# EAGLE board QuadSerialHBridge-1.0-bad (EAGLE 6.4)
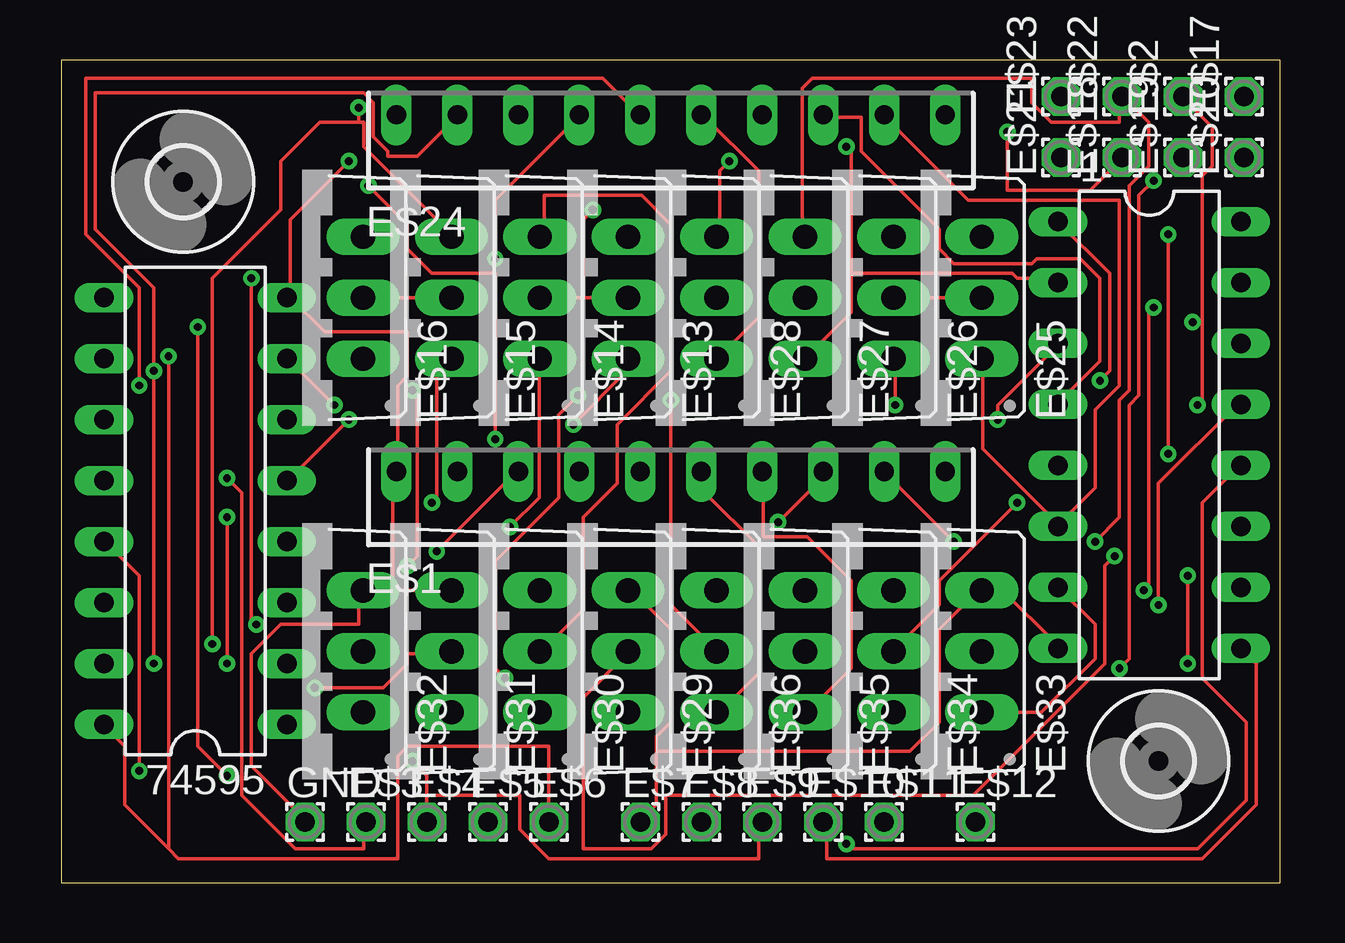
[diagram p0: board, top side]
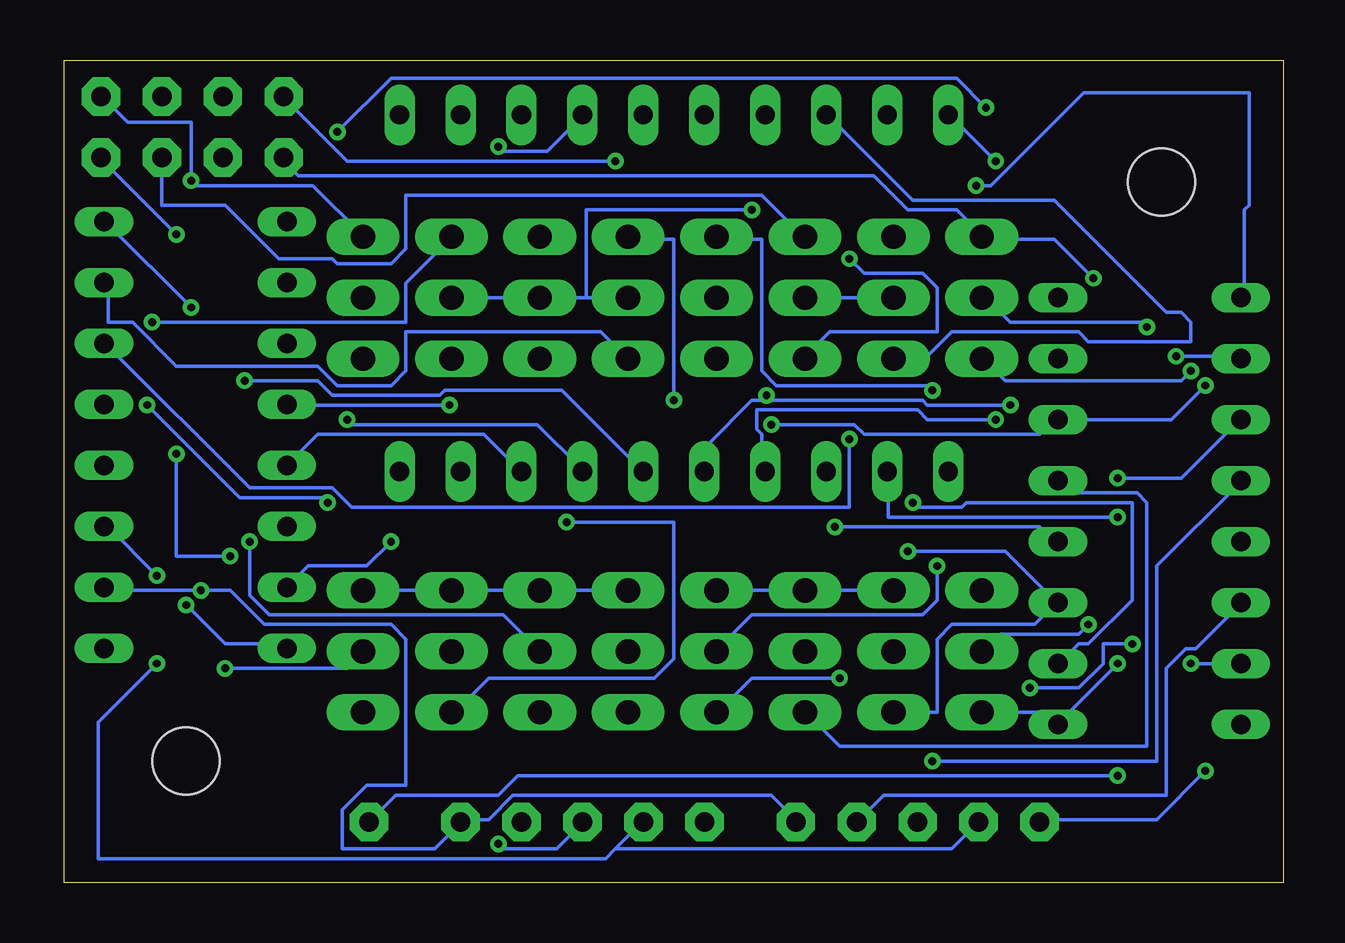
[diagram p1: board, bottom side, seen from below]

Size 50.8 x 34.29 mm. Coordinates in mm from the lower left corner, seen from the top.
Outline: 0,34.29 0,0 50.8,0 50.8,34.29 0,34.29
Copper layers (1*16): Top 0.0356mm / dielectric 1.5011mm / Bottom 0.0356mm
Design rules "LaenPCBOrder": minimum track width 6mil, minimum drill 13mil, track to track 6mil, track to pad 6mil, pad to pad 6mil, via to via 6mil, smd to smd 6mil, copper to edge 15mil, drill to drill 6mil, minimum pad ring 7mil, minimum via ring 7mil, stop-mask expansion 4mil, vias tented up to drill 0mil, thermal gap 10mil

## Footprints (pad centres in the part's own frame; a part is rotated, then mirrored left to right if it is on the bottom)
DIL16 = drill 0.813 long: 1 -8.89,-3.81; 2 -6.35,-3.81; 3 -3.81,-3.81; 4 -1.27,-3.81; 5 1.27,-3.81; 6 3.81,-3.81; 7 6.35,-3.81; 8 8.89,-3.81; 9 8.89,3.81; 10 6.35,3.81; 11 3.81,3.81; 12 1.27,3.81; 13 -1.27,3.81; 14 -3.81,3.81; 15 -6.35,3.81; 16 -8.89,3.81
SIP-10 = drill 0.8 pad 1.27 long: 1 -11.43,0; 2 -8.89,0; 3 -6.35,0; 4 -3.81,0; 5 -1.27,0; 6 1.27,0; 7 3.81,0; 8 6.35,0; 9 8.89,0; 10 11.43,0
1,6/0,8 = drill 0.813 pad 1.6 octagon: 1 0,0
TO220V = drill 1.016 long: 1 -2.54,-2.54; 2 0,-2.54; 3 2.54,-2.54
2,8 = hole 2.8: 0,0

## Placement (x,y rotation side)
1  74595  [DIL16]  45.34,18.67 270 top
74595  74595  [DIL16]  5.59,15.49 90 top
E$1  [SIP-10]  25.4,17.14 0 top
E$2  [1,6/0,8]  46.74,32.77 90 top
E$3  [1,6/0,8]  12.7,2.54 0 top
E$4  [1,6/0,8]  15.24,2.54 0 top
E$5  [1,6/0,8]  17.78,2.54 0 top
E$6  [1,6/0,8]  20.32,2.54 0 top
E$7  [1,6/0,8]  24.13,2.54 0 top
E$8  [1,6/0,8]  26.67,2.54 0 top
E$9  [1,6/0,8]  29.21,2.54 0 top
E$10  [1,6/0,8]  31.75,2.54 0 top
E$11  [1,6/0,8]  34.29,2.54 0 top
E$12  [1,6/0,8]  38.1,2.54 0 top
E$13  [TO220V]  21.08,24.38 90 top
E$14  [TO220V]  17.4,24.38 90 top
E$15  [TO220V]  13.72,24.38 90 top
E$16  [TO220V]  10.03,24.38 90 top
E$17  [1,6/0,8]  49.28,32.77 90 top
E$18  [1,6/0,8]  44.2,30.23 90 top
E$19  [1,6/0,8]  46.74,30.23 90 top
E$20  [1,6/0,8]  49.28,30.23 90 top
E$21  [1,6/0,8]  41.66,30.23 90 top
E$22  [1,6/0,8]  44.2,32.77 90 top
E$23  [1,6/0,8]  41.66,32.77 90 top
E$24  [SIP-10]  25.4,32 0 top
E$25  [TO220V]  35.81,24.38 90 top
E$26  [TO220V]  32.13,24.38 90 top
E$27  [TO220V]  28.45,24.38 90 top
E$28  [TO220V]  24.77,24.38 90 top
E$29  [TO220V]  21.08,9.65 90 top
E$30  [TO220V]  17.4,9.65 90 top
E$31  [TO220V]  13.72,9.65 90 top
E$32  [TO220V]  10.03,9.65 90 top
E$33  [TO220V]  35.81,9.65 90 top
E$34  [TO220V]  32.13,9.65 90 top
E$35  [TO220V]  28.45,9.65 90 top
E$36  [TO220V]  24.77,9.65 90 top
E$40  [2,8]  5.08,29.21 0 top
E$42  [2,8]  45.72,5.08 0 top
GND  [1,6/0,8]  10.16,2.54 0 top

## Library data of the parts
1 74595 = 74xx-us
E$1 E$24 = linear
E$2-E$12 E$17-E$23 GND = wirepad
E$13-E$16 E$25-E$36 = transistor-pnp
E$40 E$42 = holes

## Nets
S$1: 74595.1 E$1.2 E$32.1
S$2: 1.10 1.16 74595.10 74595.16 E$6.1 E$11.1
S$3: 1.11 74595.11 E$3.1 E$8.1
S$4: 1.12 74595.12 E$4.1 E$9.1
S$5: 74595.14 E$5.1
S$6: 1.14 74595.9
S$7: 1.15 E$24.6 E$28.1
S$8: 74595.2 E$15.1 E$24.3
S$9: E$12.1 E$13.2 E$14.2 E$15.2 E$16.2 E$25.2 E$26.2 E$27.2 E$28.2
S$10: 74595.15 E$16.1 E$24.2
S$11: 74595.4 E$14.1 E$24.4
S$12: 1.8 1.13 74595.8 74595.13 E$1.1 E$7.1 E$24.1 E$29.3 E$30.3 E$31.3 E$32.3 E$33.3 E$34.3 E$35.3 E$36.3 GND.1
S$13: 1.2 E$24.7 E$27.1
S$14: 1.4 E$24.8 E$26.1
S$15: 1.6 E$24.9 E$25.1
S$16: 1.1 E$1.6 E$36.1
S$17: 1.3 E$1.7 E$35.1
S$18: 1.5 E$1.8 E$34.1
S$19: 74595.3 E$1.3 E$31.1
S$20: 74595.5 E$1.4 E$30.1
S$21: 1.7 E$1.9 E$33.1
S$22: 1.9 E$10.1
S$23: 74595.6 E$13.1 E$24.5
S$24: 74595.7 E$1.5 E$29.1
S$25: E$23.1 E$28.3 E$36.2
S$26: E$22.1 E$27.3 E$35.2
S$27: E$2.1 E$26.3 E$34.2
S$28: E$16.3 E$21.1 E$32.2
S$29: E$15.3 E$18.1 E$31.2
S$30: E$14.3 E$19.1 E$30.2
S$31: E$13.3 E$20.1 E$29.2
S$32: E$17.1 E$25.3 E$33.2

## Tracks (layer width: path | path; a pad name or v marks a point on that pad's centre or on a via)
S$1  (via drill 0.33)
  Top 0.152: v6.91,9.14 v6.91,15.24
  Bottom 0.152: E$32.1 9.96,7.11 9.55,6.71 74595.1 9.35,6.71 v6.91,9.14 | v6.91,15.24 16.46,15.24 16.46,17.07 E$1.2
S$2  (via drill 0.33)
  Top 0.152: 4.47,1.42 4.88,1.02 14.02,1.02 14.02,5.28 14.43,5.69 20.32,5.69 E$6.1 | 4.47,1.42 2.64,3.25 2.64,5.69 1.83,6.5 74595.16 | 4.47,1.42 v4.47,21.95 | v45.52,23.98 45.31,23.77 45.31,12.39 v45.11,12.19
  Bottom 0.152: v4.47,21.95 1.83,21.95 74595.10 | 1.10 48.97,12.19 v45.11,12.19 43.89,12.19 42.47,10.77 37.19,10.77 36.58,10.16 36.58,4.06 38.2,4.06 39.22,3.05 39.22,1.42 35.36,1.42 34.34,2.44 E$11.1 34.14,2.64 33.12,2.64 32.11,3.66 21.34,3.66 20.32,2.64 E$6.1 | v45.52,23.98 48.97,27.43 1.16
S$3  (via drill 0.33)
  Top 0.152: v6.91,16.87 7.52,16.26 7.52,3.66 9.75,1.42 12.6,1.42 12.6,2.44 E$3.1 | v46.94,9.14 v46.94,12.8
  Bottom 0.152: v6.91,16.87 4.27,16.87 1.83,19.3 74595.11 | v46.94,12.8 48.97,14.83 1.11 | v46.94,9.14 49.38,6.71 49.38,1.02 28.25,1.02 27.84,1.42 | 27.84,1.42 26.82,2.44 E$8.1 | E$3.1 13.82,1.42 27.84,1.42
S$4  (via drill 0.33)
  Top 0.152: v14.63,5.08 15.24,4.47 15.24,3.66 | E$4.1 15.24,3.66 | v32.72,1.63 32.72,1.42 47.35,1.42 49.38,3.45 49.38,6.71 47.55,8.53 47.55,15.85 48.97,17.27 1.12 | 15.24,3.66 19.1,3.66 19.1,2.23 20.32,1.02 29.06,1.02 29.06,2.44 E$9.1
  Bottom 0.152: v14.63,5.08 5.28,5.08 5.28,13.21 1.83,16.66 74595.12 | v32.72,1.63 32.51,1.42 30.28,1.42 29.26,2.44 E$9.1
S$5
  Bottom 0.152: E$5.1 16.66,3.66 4.88,3.66 4.88,8.94 4.06,9.75 3.66,9.75 1.83,11.58 74595.14
S$6  (via drill 0.33)
  Top 0.152: v12.8,29.06 14.43,27.43 14.43,26.42 15.44,25.4 18.09,25.4 v18.09,18.49
  Bottom 0.152: v12.8,29.06 12.19,29.06 8.33,32.92 1.42,32.92 1.42,28.25 1.63,28.04 1.63,24.38 74595.9 | v18.09,18.49 18.09,15.65 38.81,15.65 39.62,16.46 43.08,16.46 48.97,22.35 1.14
S$7
  Top 0.152: E$24.6 26.82,31.9 29.06,29.67 29.06,23.57 27.43,21.95 E$28.1
  Bottom 0.152: 1.15 48.97,24.99 48.97,23.37 47.95,23.37 46.13,21.54 40.23,21.54 39.42,20.73 37.19,20.73 36.58,21.34 36.58,22.96 28.45,22.96 27.43,21.95 E$28.1
S$8  (via drill 0.33)
  Top 0.152: v15.44,15.85 15.65,16.05 15.65,21.13 16.26,21.74 E$15.1
  Bottom 0.152: v15.44,15.85 15.24,15.65 13.41,15.65 13.21,15.85 6.3,15.85 6.3,11.79 8.13,9.96 8.53,9.96 9.35,9.14 74595.2 | E$24.3 18.9,31.9 15.44,28.45 9.55,28.45 4.88,23.77 4.27,23.77 3.86,23.37 3.86,22.55 8.13,22.55 8.53,22.96 13.82,22.96 14.83,21.95 16.26,21.95 E$15.1
S$9  (via drill 0.33)
  Top 0.152: E$25.2 E$26.2 | E$13.2 21.74,24.38 | 21.74,24.38 E$14.2 | E$15.2 E$16.2 | v6.91,4.47 5.69,5.69 v5.69,23.16 | v22.15,28.04 21.74,27.64 21.74,24.38
  Bottom 0.152: 29.06,24.38 E$27.2 E$26.2 | 29.06,24.38 E$28.2 | E$12.1 36.98,3.66 32.72,3.66 31.9,4.47 v6.91,4.47 | v5.69,23.16 5.89,23.37 11.38,23.37 12.39,24.38 E$16.2 | E$15.2 E$14.2 | 29.06,24.38 29.06,28.04 v22.15,28.04
S$10  (via drill 0.33)
  Top 0.152: v3.86,9.14 v3.86,21.34 3.86,24.79 1.42,27.23 1.42,32.92 12.6,32.92 13.01,32.51 13.01,31.09 13.61,30.48 13.61,30.28 14.83,30.28 16.46,31.9 E$24.2
  Bottom 0.152: v3.86,9.14 74595.15 | v3.86,21.34 4.27,20.93 11.58,20.93 12.39,21.74 E$16.1
S$11  (via drill 0.33)
  Top 0.152: v18.69,14.83 19.91,16.05 19.91,21.74 E$14.1 | v18.09,26.01 18.09,28.45 21.54,31.9 E$24.4
  Bottom 0.152: v18.69,14.83 10.16,14.83 9.55,14.22 74595.4 | v18.09,26.01 17.48,25.4 15.04,25.4 14.43,24.79 14.43,22.96 18.9,22.96 19.91,21.95 E$14.1
S$12  (via drill 0.33)
  Top 0.152: 1.8 41.45,9.96 39.22,12.19 E$33.3 38.2,12.19 36.58,10.57 36.58,6.71 35.36,5.49 24.79,5.49 | v45.72,11.58 45.72,16.66 48.97,19.91 1.13 | v3.25,4.67 3.25,12.8 1.83,14.22 74595.13 | 9.55,24.38 10.97,22.96 14.43,22.96 14.43,21.13 14.02,20.73 14.02,17.27 E$1.1 13.82,17.07 13.82,12.19 | v11.99,30.07 9.55,27.64 9.55,24.38 | 9.55,24.38 74595.8 | E$31.3 13.82,12.19 | 24.79,5.49 24.79,6.1 25.4,6.71 25.4,10.57 23.77,12.19 E$29.3 | 24.79,5.49 24.79,3.25 24.18,2.64 E$7.1 | 13.82,12.19 E$32.3 12.39,12.19 12.39,10.77 9.14,10.77 7.92,9.55 7.92,4.88 10.16,2.64 GND.1
  Bottom 0.152: E$36.3 E$35.3 E$34.3 E$33.3 | v45.72,11.58 44.09,9.96 41.66,9.96 1.8 | v3.25,4.67 5.28,2.64 10.16,2.64 GND.1 | v11.99,30.07 13.82,31.9 E$24.1 | E$29.3 E$30.3 E$31.3
S$13  (via drill 0.33)
  Top 0.152: 32.92,25.4 39.62,25.4 39.83,25.2 41.45,25.2 1.2 | 32.92,25.4 32.92,23.77 E$27.1 | v32.72,30.68 32.92,30.48 32.92,25.4
  Bottom 0.152: v32.72,30.68 32.51,30.48 30.68,30.48 29.26,31.9 E$24.7
S$14  (via drill 0.33)
  Top 0.152: v34.75,19.91 34.75,21.74 E$26.1 | E$24.8 31.9,31.9 33.33,31.9 33.33,30.48 36.58,27.23 36.58,26.42 37.19,25.81 40.44,25.81 40.64,26.01 42.47,26.01 43.28,25.2 43.28,21.74 41.66,20.12 1.4
  Bottom 0.152: v34.75,19.91 41.45,19.91 1.4
S$15
  Top 0.152: E$25.1 38.41,21.74 38.41,18.09 41.45,15.04 1.6 41.66,15.04 43.08,16.46 43.08,19.71 44.09,20.73 44.09,28.45 37.8,28.45 34.34,31.9 E$24.9
S$16  (via drill 0.33)
  Top 0.152: 1.1 43.69,25.4 43.69,21.34 v43.28,20.93 | E$36.1 27.43,7.11 29.06,8.74 29.06,14.02 26.82,16.26 26.82,17.07 E$1.6
  Bottom 0.152: v43.28,20.93 40.23,20.93 39.62,20.32 35.15,20.32 34.95,20.52 30.07,20.52 26.82,17.27 E$1.6
S$17  (via drill 0.33)
  Top 0.152: v39.01,19.3 39.01,19.91 41.45,22.35 1.3 | E$35.1 31.09,7.11 32.92,8.94 32.92,12.6 31.09,14.43 29.26,14.43 29.26,17.07 E$1.7
  Bottom 0.152: v39.01,19.3 38.81,19.1 31.09,19.1 29.26,17.27 E$1.7
S$18  (via drill 0.33)
  Top 0.152: v29.87,15.04 31.7,16.87 31.7,17.07 E$1.8
  Bottom 0.152: 1.5 40.23,18.69 33.33,18.69 31.9,17.27 E$1.8 | v29.87,15.04 25.4,15.04 25.4,9.35 26.21,8.53 33.12,8.53 34.54,7.11 E$34.1
S$19  (via drill 0.33)
  Top 0.152: v15.65,13.82 18.9,17.07 E$1.3
  Bottom 0.152: E$31.1 14.43,7.11 14.43,10.16 13.82,10.77 10.36,10.77 9.55,11.58 74595.3 9.55,11.79 11.58,13.82 v15.65,13.82
S$20  (via drill 0.33)
  Top 0.152: v11.99,19.3 9.55,16.87 74595.5
  Bottom 0.152: 74595.5 9.35,16.66 8.94,16.26 6.1,16.26 5.69,15.85 5.69,5.69 18.49,5.69 19.91,7.11 E$30.1 | v11.99,19.3 14.83,19.3 15.24,19.71 21.95,19.71 21.95,18.9 21.74,18.69 21.74,17.27 E$1.4
S$21  (via drill 0.33)
  Top 0.152: 1.7 43.08,10.77 43.08,9.35 40.84,7.11 E$33.1 | v37.19,14.22 34.34,17.07 E$1.9
  Bottom 0.152: v37.19,14.22 38.2,13.21 40.64,13.21 1.7
S$22
  Top 0.152: 1.9 49.78,9.14 49.78,3.25 47.55,1.02 31.9,1.02 31.9,2.44 E$10.1
S$23  (via drill 0.33)
  Top 0.152: v21.34,19.1 23.57,21.34 23.57,21.74 E$13.1 | v3.25,20.73 3.25,24.79 1.02,27.03 1.02,33.53 22.55,33.53 23.98,32.11 E$24.5
  Bottom 0.152: v21.34,19.1 17.88,19.1 17.48,18.69 10.16,18.69 9.55,19.3 74595.6 4.67,19.3 v3.25,20.73
S$24  (via drill 0.33)
  Top 0.152: v11.38,19.91 9.55,21.74 74595.7 | v18.49,8.53 18.09,8.94 18.09,13.41 20.73,16.05 20.73,19.51 v21.54,20.32
  Bottom 0.152: v11.38,19.91 14.83,19.91 15.04,20.12 21.54,20.12 | 21.54,20.12 22.15,20.12 23.98,18.29 23.98,17.27 E$1.5 | v18.49,8.53 22.15,8.53 23.57,7.11 E$29.1 | 21.54,20.12 v21.54,20.32
S$25  (via drill 0.33)
  Top 0.152: v25.4,20.12 25.4,11.58 27.23,9.75 E$36.2 | v27.84,30.07 27.43,29.67 27.43,27.03 E$28.3
  Bottom 0.152: v25.4,20.12 25.4,26.82 27.23,26.82 E$28.3 | v27.84,30.07 39.01,30.07 41.66,32.72 E$23.1
S$26  (via drill 0.33)
  Top 0.152: v43.08,14.22 44.09,15.24 44.09,20.12 44.5,20.52 44.5,29.06 45.31,29.87 45.31,31.7 44.3,32.72 E$22.1 44.09,32.72 44.09,31.7 41.25,31.7 40.44,32.51 40.44,33.53 31.29,33.53 30.89,33.12 30.89,27.03 E$27.3
  Bottom 0.152: E$35.2 32.51,11.18 42.27,11.18 43.08,11.99 v43.08,14.22
S$27  (via drill 0.33)
  Top 0.152: v39.83,15.85 36.58,12.6 36.58,11.58 34.75,9.75 E$34.2 | v47.35,19.91 47.55,20.12 47.55,23.37 | 47.55,23.37 47.55,29.46 47.95,29.87 47.95,31.5 46.74,32.72 E$2.1 | 47.55,23.37 v47.14,23.37
  Bottom 0.152: v39.83,15.85 40.03,16.05 43.48,16.05 v47.35,19.91 | v47.14,23.37 36.58,23.37 36.58,24.99 34.75,26.82 E$26.3
S$28  (via drill 0.33)
  Top 0.152: v8.13,10.77 7.92,10.97 v7.92,25.2
  Bottom 0.152: v8.13,10.77 8.53,10.36 11.79,10.36 12.39,9.75 E$32.2 | v7.92,25.2 9.55,26.82 12.39,26.82 E$16.3 12.6,27.03 13.61,28.04 15.65,28.04 17.07,29.46 41.05,29.46 41.66,30.07 E$21.1
S$29  (via drill 0.33)
  Top 0.152: v10.57,8.13 13.41,8.13 14.43,9.14 14.43,9.55 16.26,9.55 E$31.2 | v6.3,9.96 6.3,25.2 9.14,28.04 9.14,30.07 10.77,31.7 12.39,31.7 | 12.39,31.7 12.6,31.7 12.6,30.68 16.26,27.03 E$15.3 | v39.42,31.29 39.42,28.85 42.88,28.85 44.09,30.07 E$18.1 | 12.39,31.7 v12.39,32.31
  Bottom 0.152: v10.57,8.13 8.53,8.13 7.52,9.14 7.52,9.96 v6.3,9.96 | v39.42,31.29 37.19,33.53 13.61,33.53 v12.39,32.31
S$30
  Top 0.152: E$30.2 20.12,9.75 21.74,11.38 21.74,15.24 23.16,16.66 23.16,19.1 25.4,21.34 25.4,27.43 24.18,28.65 20.12,28.65 20.12,27.03 E$14.3
  Bottom 0.152: E$19.1 46.74,28.25 44.09,28.25 41.86,26.01 39.62,26.01 39.42,25.81 37.19,25.81 36.58,26.42 36.58,28.65 21.74,28.65 20.12,27.03 E$14.3
S$31  (via drill 0.33)
  Top 0.152: v14.43,13.21 14.83,13.61 14.83,20.32 v14.63,20.52 | v46.13,17.88 v46.13,27.03 | v43.89,13.61 43.48,13.21 43.48,9.14 38,3.66 25.2,3.66 25.2,2.03 24.59,1.42 21.74,1.42 21.74,7.72 23.57,9.55 E$29.2
  Bottom 0.152: v14.43,13.21 14.43,11.79 15.04,11.18 22.15,11.18 23.57,9.75 E$29.2 | v14.63,20.52 14.83,20.73 21.13,20.73 21.74,21.34 21.74,26.82 23.57,26.82 E$13.3 | v46.13,27.03 49.17,30.07 E$20.1 | v46.13,17.88 46.13,13.61 v43.89,13.61
S$32  (via drill 0.33)
  Top 0.152: v44.09,8.94 44.5,9.35 44.5,19.91 44.91,20.32 44.91,28.65 v45.52,29.26
  Bottom 0.152: v44.09,8.94 39.01,8.94 38.41,9.55 E$33.2 | E$17.1 49.17,32.72 48.16,31.7 45.52,31.7 v45.52,29.26 45.31,29.06 40.44,29.06 38.41,27.03 E$25.3

## Text on the board
tNames: O5 | O6 | O7 | O8 | O1 | O2 | O3 | O4 | GND | SHCP | STCP | DSI | Vcc | GND | SHCP | STCP | DSO | Vcc | Vload